# EAGLE board openSX70-dongle_v4-push-MINI (EAGLE 9.2.0)
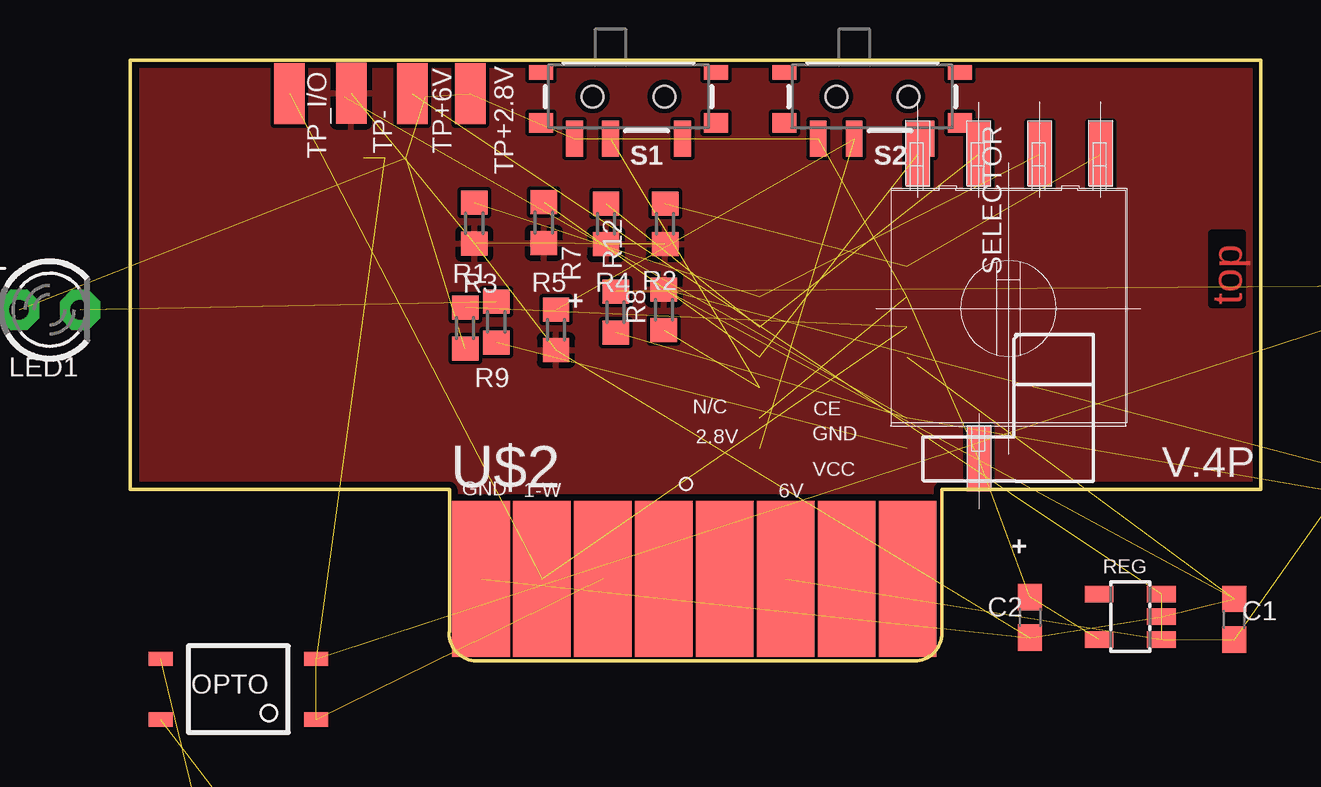
[diagram p0: board, top side]
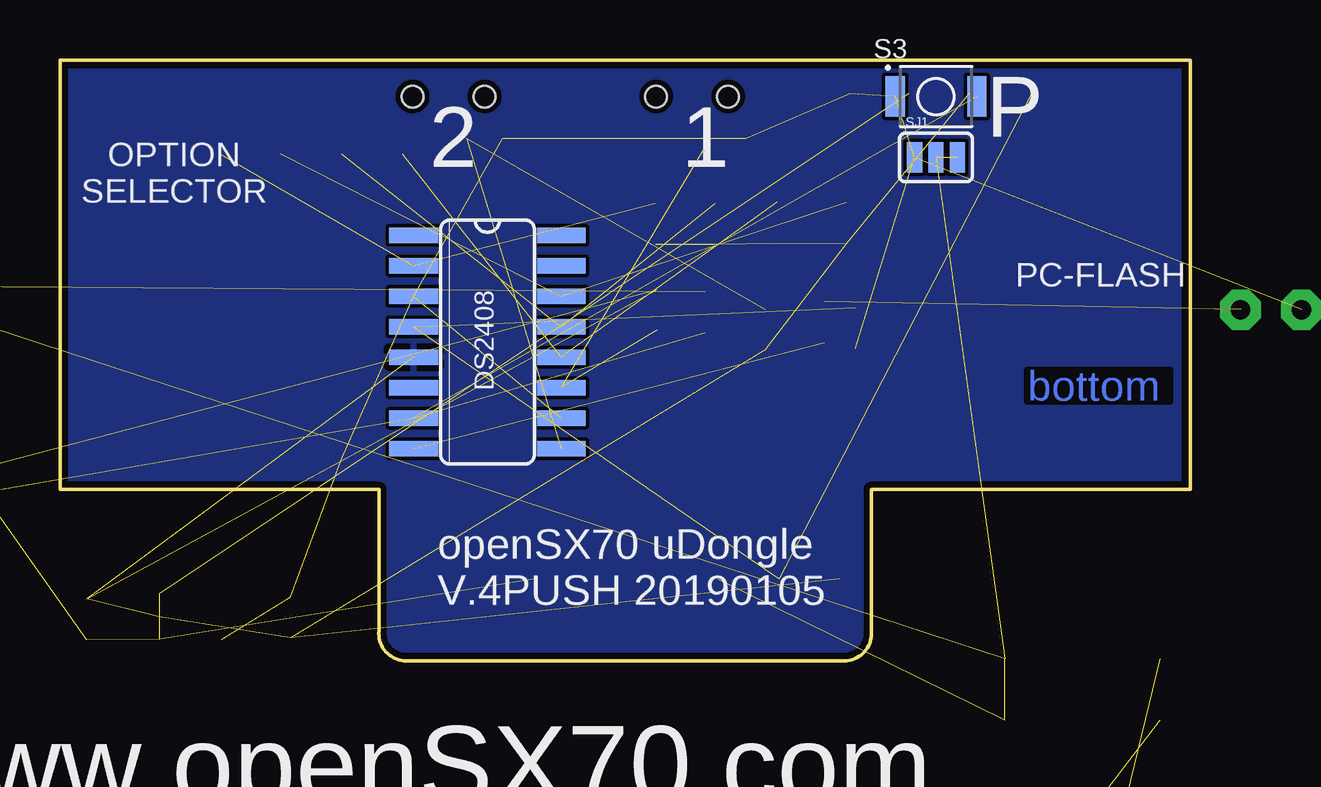
[diagram p1: board, bottom side, seen from below]

Size 47.12 x 25.04 mm. Coordinates in mm from the lower left corner, seen from the top.
Outline: 33.84,7.01 33.82,7.14
Outline: 33.82,7.14 33.82,1.24 arc-90 32.8,0 14.31,0 arc-90 13.3,1.24 13.3,7.14 0,7.14 0,25.04 47.12,25.04 47.12,7.14 33.82,7.14
Copper layers (1*16): Top 0.035mm / dielectric 1.5mm / Bottom 0.035mm
Design rules "SeeedStudio_2layer_DRU_no_angle_20140221": minimum track width 6mil, minimum drill 12mil, track to track 6mil, track to pad 6mil, pad to pad 6mil, via to via 6mil, smd to smd 0mil, copper to edge 10mil, drill to drill 10mil, minimum pad ring 10mil, minimum via ring 6mil, stop-mask expansion 2mil, vias tented up to drill 100mil, thermal gap 10mil
Net classes: 0 GND: width 0.305 mm; 1 VCC: width 0.254 mm; 2 2.8V: width 0.254 mm

## Footprints (pad centres in the part's own frame; a part is rotated, then mirrored left to right if it is on the bottom)
C0603 = smd 1.1 x 1: 1 -0.85,0; 2 0.85,0
SO16 = smd 0.66 x 2.032: 1 -4.445,-3.073; 2 -3.175,-3.073; 3 -1.905,-3.073; 4 -0.635,-3.073; 5 0.635,-3.073; 6 1.905,-3.073; 7 3.175,-3.073; 8 4.445,-3.073; 9 4.445,3.073; 10 3.175,3.073; 11 1.905,3.073; 12 0.635,3.073; 13 -0.635,3.073; 14 -1.905,3.073; 15 -3.175,3.073; 16 -4.445,3.073
CUI_SJ-3523-SMT-TR = smd 2.2 x 2.8: 1 -1.1,-3.7; 3 0.9,3.7 | smd 2.8 x 2.8: 2 8.3,-3.7 | hole 1.7: 0,0; 7,0
LED3MM = drill 0.813 pad 1.676 octagon: A -1.27,0; K 1.27,0
SO-4 = smd 1 x 0.6: 1 -3.24,0.635; 2 -3.24,-1.905; 3 3.24,-1.905; 4 3.24,0.635
R0603 = smd 1 x 1.1: 1 -0.85,0; 2 0.85,0
SOT-23-5 = smd 0.69 x 1.2: 1 -0.95,-1.3; 2 0,-1.3; 3 0.95,-1.3; 4 0.95,1.3; 5 -0.95,1.3
SWITCH_SPST_SMD_A = smd 0.7 x 1.5: 1 -2.25,-1.75; 2 -0.75,-1.75; 3 2.25,-1.75 | smd 1 x 0.6: GND1 -3.65,1; GND3 3.65,1 | smd 1 x 0.8: GND2 -3.65,-1.1; GND4 3.65,-1.1 | hole 0.9: -1.5,0; 1.5,0
SW_B3U-1000P = smd 0.8 x 1.7: 1 -1.7,0; 2 1.7,0
A6RS-161RS = smd 1 x 2.7: 1 8.89,-1.397; 2 6.35,-1.397; 4 3.81,-1.397; 8 1.27,-1.397; C 6.35,11.303
SJ_3 = smd 0.635 x 1.27: 1 -0.889,0; 2 0,0; 3 0.889,0
SMD1,27-2,54 = smd 1.27 x 2.54: 1 0,0
SX70-FLASH-EDGE8 = smd 2.4 x 6.502: FLASH-1 8.89,0.001; FLASH-2 6.35,0.001; FLASH-3 1.27,0.001; FLASH-4 -1.27,0.001; FLASH-5 -3.81,0.001; GND -8.89,0.001; S2 -6.35,0.001; VCC-6V 3.81,0.001

## Placement (x,y rotation side)
C1  1.0uF  [C0603]  46.01,1.73 90 top
C2  1.0uF  [C0603]  37.5,1.8 270 top
DS2408  DS2408  [SO16]  29.3,13.28 270 bottom
J1  JACK-SMD-SJ-3523-SMT-TR  [CUI_SJ-3523-SMT-TR]  6.79,-14.58 0 top  (outside the outline)
LED1  [LED3MM]  -3.37,14.63 0 top
OPTO  TLP127  [SO-4]  4.5,-1.83 180 top
R1  4K7  [R0603]  13.96,13.87 270 top
R2  100K  [R0603]  22.29,18.21 270 top
R3  100K  [R0603]  14.34,18.24 90 top
R4  100K  [R0603]  19.82,18.21 90 top
R5  100K  [R0603]  17.23,18.26 90 top
R7  100K  [R0603]  17.74,13.79 270 top
R8  100K  [R0603]  22.24,14.63 90 top
R9  220R  [R0603]  15.25,14.12 90 top
R10  10R  [R0603]  56.22,15.65 0 top  (outside the outline)
R11  18R  [R0603]  54.95,12.32 0 top  (outside the outline)
R12  220R  [R0603]  20.23,14.53 90 top
R13  100K  [R0603]  57.72,5.89 0 top  (outside the outline)
REG  NCP4688  [SOT-23-5]  41.68,1.83 90 top
S1  [SWITCH_SPST_SMD_A]  20.76,23.52 0 top
S2  [SWITCH_SPST_SMD_A]  30.92,23.52 0 top
S3  B3U-1000P  [SW_B3U-1000P]  10.6,23.52 0 bottom
SELECTOR  SELECTOR-4-1-SMD-A6RS  [A6RS-161RS]  41.72,19.71 180 top
SJ1  [SJ_3]  10.6,20.98 0 bottom
TP+2.8V  [SMD1,27-2,54]  14.16,23.65 0 top
TP+6V  [SMD1,27-2,54]  11.75,23.65 0 top
TP-  [SMD1,27-2,54]  9.21,23.66 0 top
TP_I/O  [SMD1,27-2,54]  6.63,23.63 0 top
U$2  SX70-FLASH-EDGE8-MALE-PROPER  [SX70-FLASH-EDGE8]  23.51,3.4 0 top

## Library data of the parts
C1 C2 = rcl; SPICEPREFIX: C
DS2408 = DS2408-joaco
J1 = _openSX70; AVAILABILITY: Unavailable; CUI_PURCHASE_URL: https://www.cui.com/product/interconnect/audio-connectors/3.5-mm-jacks/sj-352x-smt-series?utm_source=snapeda.com&utm_medium=referral&utm_campaign=snapedaBOM; DESCRIPTION: SJ Series 3.5 mm 12 V SMT Right Angle Stereo Audio Jack; MF: CUI Inc.; MP: SJ-3523-SMT-TR; PACKAGE: LGA-10 STMicroelectronics; PRICE: None
LED1 = adafruit
OPTO REG = openSX70
R1-R5 R7-R9 R12 R13 = rcl; SPICEPREFIX: R
R10 R11 = resistor
S1 S2 = SparkFun-Switches; PROD_ID: SWCH-10651; SF_SKU: COM-10860
S3 = Common-Parts-Library-Eagle; MANUFACTURER: Omron
SELECTOR U$2 = _openSX70
SJ1 = SparkFun-Passives
TP+2.8V TP+6V TP- TP_I/O = wirepad

## Nets
2.8V: C2.1 DS2408.3 DS2408.10 LED1.A R1.2 REG.5 S1.1 S2.1 S3.1 SELECTOR.C SJ1.1 TP+2.8V.1
FLASH1: OPTO.1 OPTO.2 R10.1 R11.2 R12.2 SJ1.2 SJ1.3 U$2.FLASH-5
GND: C1.2 C2.2 DS2408.5 R2.2 R3.1 R4.1 R5.1 R7.2 R8.2 R13.2 REG.2 TP-.1 U$2.GND
N$1: DS2408.4 R1.1 TP_I/O.1 U$2.S2
N$2: LED1.K R9.2
N$3: DS2408.2 R2.1 SELECTOR.8
N$4: DS2408.14 R3.2 SELECTOR.4
N$5: DS2408.13 R4.2 SELECTOR.2
N$6: DS2408.11 R8.1 S1.2
N$7: DS2408.9 R7.1 S2.2
N$8: DS2408.8 R9.1
N$9: DS2408.7 R12.1 R13.1 S3.2
N$12: J1.2 J1.3 OPTO.4
N$13: DS2408.12 R5.2 SELECTOR.1
N$15: J1.1 OPTO.3
VCC: C1.1 R10.2 R11.1 REG.1 REG.3 TP+6V.1 U$2.VCC-6V

## Tracks (layer width: path | path; a pad name or v marks a point on that pad's centre or on a via)
2.8V  (11 unrouted)
FLASH1  (7 unrouted)
GND  (12 unrouted)
  pour Top: 0.44,24.79 47.43,24.79 47.43,7.01 0.44,7.01
  pour Bottom: 0.44,24.79 0.44,7.01 13.14,7.01 13.14,0.36 33.46,0.36 33.46,7.01 47.43,7.01 47.43,24.79
N$1  (3 unrouted)
N$2  (1 unrouted)
N$3  (2 unrouted)
N$4  (2 unrouted)
N$5  (2 unrouted)
N$6  (2 unrouted)
N$7  (2 unrouted)
N$8  (1 unrouted)
N$9  (3 unrouted)
N$12  (2 unrouted)
N$13  (2 unrouted)
N$15  (1 unrouted)
VCC  (6 unrouted)

## Text on the board
Top: top
Bottom: bottom
tPlace: + | V.4P | +
bPlace: www.openSX70.com
tNames: N/C | CE | 2.8V | GND | VCC | GND | 1-W | 6V
bNames: P | 1 | 2 | OPTION / SELECTOR | PC-FLASH | openSX70 uDongle / V.4PUSH 20190105